# Altium PCB hub.PcbDoc
Units mil, origin at the board's own origin, x right, y up, seen from the top; angles counter-clockwise.
Board outline 6000 x 4000 mil, 2 copper layers (Top Layer, Bottom Layer); 5 components, 0 nets, 44 pads, 0 vias.
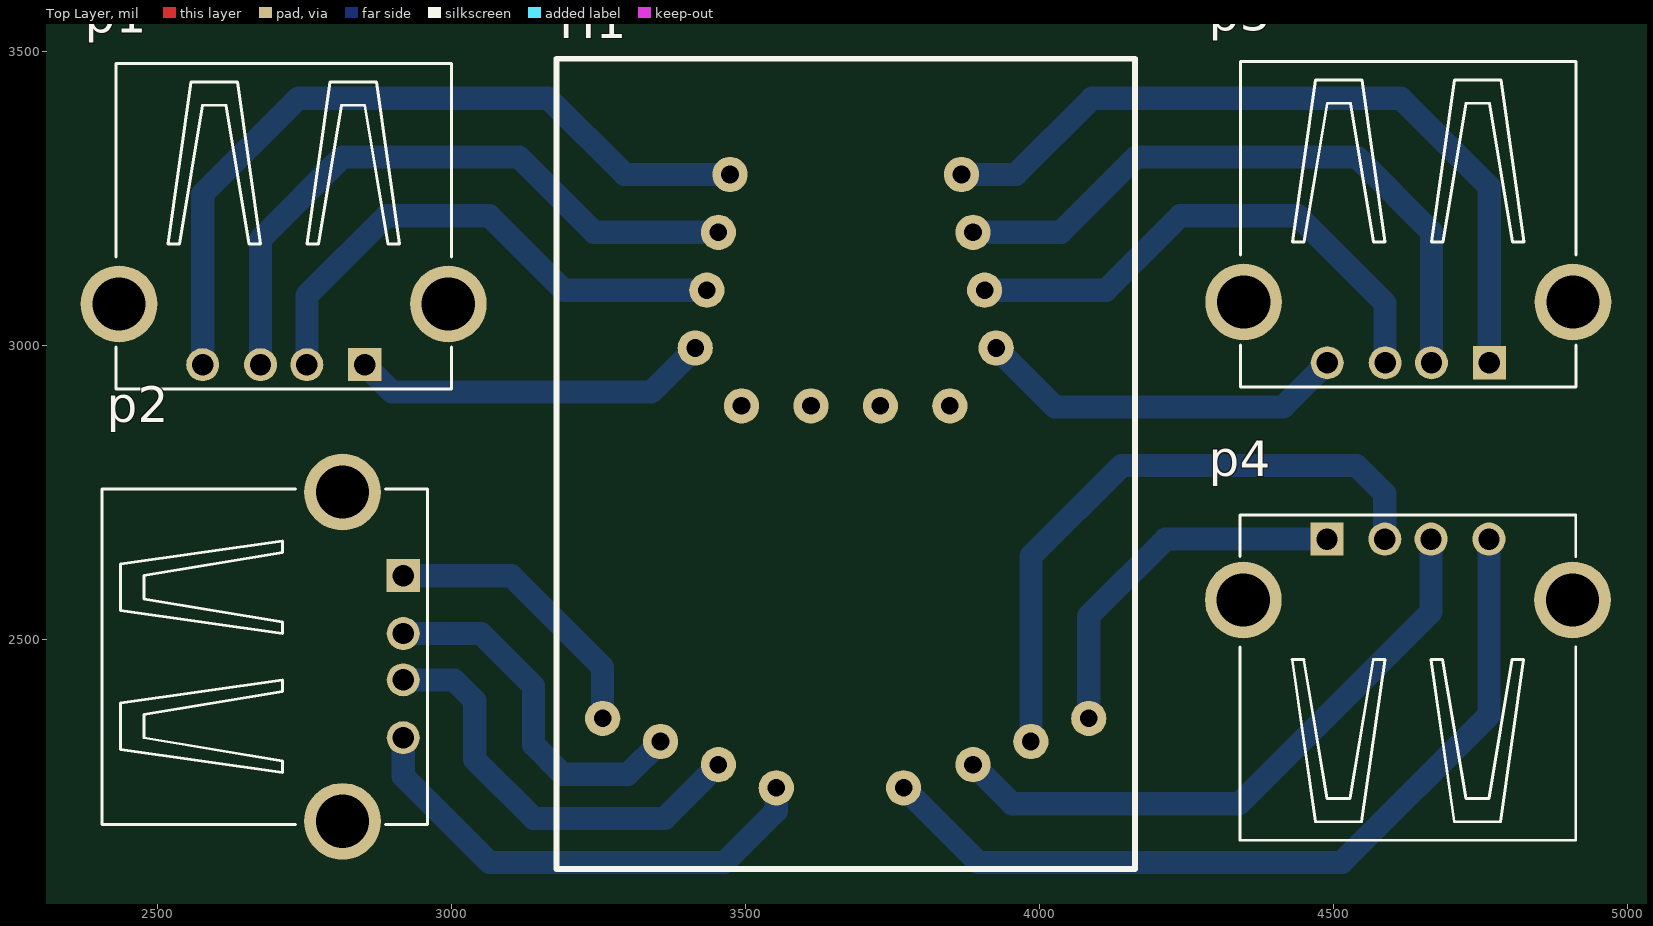
[diagram p0: Top Layer view]
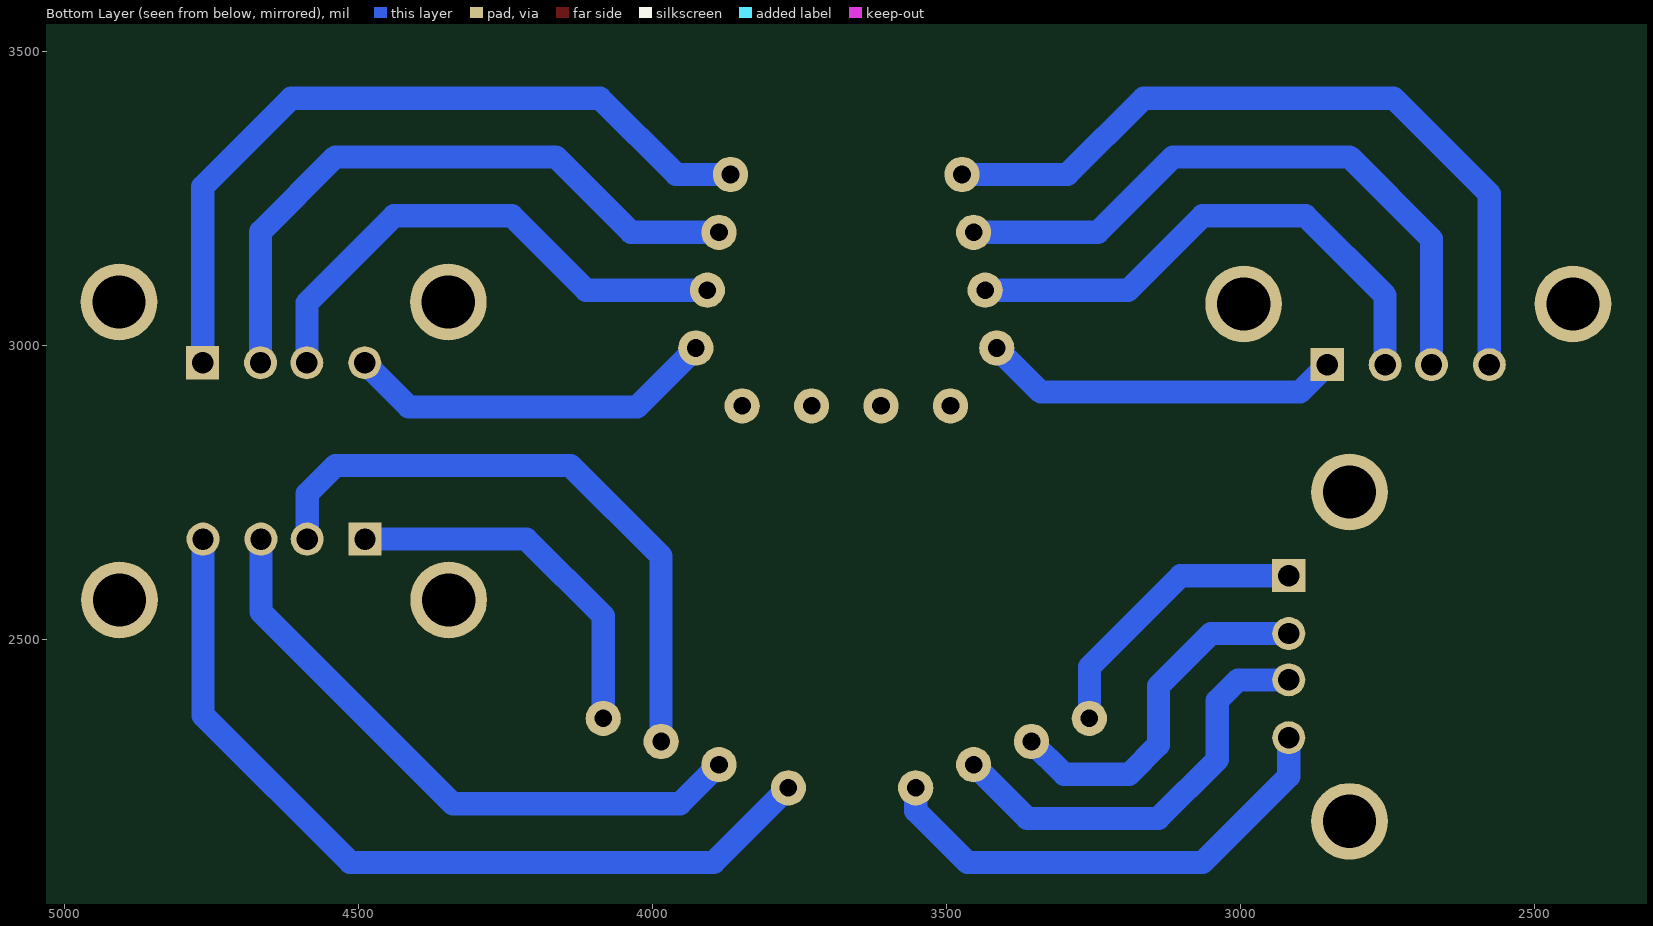
[diagram p1: Bottom Layer view, seen from below]

## Layer stack, top to bottom
Top Solder: solder mask 0.4, Solder Resist, Dk 3.5
Top Layer: signal copper 1.4
Dielectric 1: dielectric 12.6, FR-4, Dk 4.8
Bottom Layer: signal copper 1.4
Bottom Solder: solder mask 0.4, Solder Resist, Dk 3.5

## Board outline
1000,1000 7000,1000 7000,5000 1000,5000

## Design rules (kind name [scope] priority, off if disabled: settings)
Clearance [All] p1: gap=10 ignorepadtopadclearanceinfootprint=FALSE except(0: Arc-Hole Track-Hole SMDPad-Hole THPad-Hole Via-Hole Fill-Hole Poly-Hole Region-Hole Text-Hole)
PolygonConnect [All] p1: connectstyle=Relief reliefconductorwidth=10 reliefentries=4 polygonreliefangle="90 Angle" airgapwidth=10
RoutingVias [All] p1: holewidth=28 width=50 viastyle="Through Hole" minholewidth=28 minwidth=50 maxholewidth=28 maxwidth=50
SolderMaskExpansion [All] p1: expansion=4
Width [All] p1: maxlimit=10 minlimit=10 preferedwidth=10
30 further rules are at their usual default settings.

## Components (designator, comment, footprint, x,y, rotation, side; value= is the part's Value field where it differs from the comment)
H1 "hub_USB" HUB_4USB 3670.91,2768.62 r0 top
p1 "USB" USB_F 2715,3020 r180 top
p2 "USB" USB_F 2865,2470 r270 top
p3 "USB" USB_F 4627.8,3023.35 r180 top
p4 "USB" USB_F 4627.21,2616.65 r0 top

## Footprints (in the part's own frame and the unit in brackets; to place one, negate y for a bottom-side part, rotate by r counter-clockwise, add the part's x,y. Pads: shape width x height; smd on the part's side, far side on the other; paste and mask are expansions set on the pad)
HUB_4USB [mil]
  round 60 hole 30: 1(177.17,127.95) 2(59.06,127.95) 3(-59.06,127.95) 4(-177.17,127.95) 5(-255.91,226.38) 6(-236.22,324.8) 7(-216.54,423.23) 8(-196.85,521.65) 9(-413.39,-403.54) 10(-314.96,-442.91) 11(-216.54,-482.28) 12(-118.11,-521.65) 13(196.85,521.65) 14(216.54,423.23) 15(236.22,324.8) 16(255.91,226.38) 17(413.39,-403.54) 18(314.96,-442.91) 19(216.54,-482.28) 20(98.43,-521.65)
  silkscreen extent -492,-659 492,719
USB_F [mm]
  rect 1.428x1.428 hole 0.92: 1(-3.5,1.355)
  round 1.428 hole 0.92: 2(-1,1.355) 3(1,1.355) 4(3.5,1.355)
  round 3.316 hole 2.3: P1(-7.112,-1.27) P2(7.112,-1.27)
  silkscreen extent -7.25,-11.65 7.25,2.4, body extent -7.89,-11.65 7.89,2.79, height 8.55

## Nets (pads, with @x,y where several pads share a name; then routed paths per layer and width w, separated by ;. In a path a pad name is that pad's centre, name@x,y a point inside that pad or via, vN(x,y) a via of type N, cw(c..) or ccw(c..) an arc to the next point about the centre after c; other vN are vias at no path point)
pads on no net: H1.1 H1.2 H1.3 H1.4 H1.5 H1.6 H1.7 H1.8 H1.9 H1.10 H1.11 H1.12 H1.13 H1.14 H1.15 H1.16 H1.17 H1.18 H1.19 H1.20 p1.1 p1.2 p1.3 p1.4 p1.P1 p1.P2 p2.1 p2.2 p2.3 p2.4 p2.P1 p2.P2 p3.1 p3.2 p3.3 p3.4 p3.P1 p3.P2 p4.1 p4.2 p4.3 p4.4 p4.P1 p4.P2
copper on no net: | length 14789.6
  Bottom Layer w39.37: 2577.21,2966.65 2577.21,3257.21 2740,3420 3165,3420 3294.72,3290.28 3474.06,3290.28 ; 2675.63,2966.65 2675.63,3180.63 2815,3320 3115,3320 3243.15,3191.85 3454.37,3191.85 ; 2754.37,2966.65 2754.37,3084.37 2890,3220 3065,3220 3191.57,3093.43 3434.68,3093.43 ; 2852.8,2966.65 2899.45,2920 3340,2920 3415,2995 ; 2918.35,2332.21 2918.35,2266.65 3065,2120 3465,2120 3552.8,2207.8 3552.8,2246.97 ; 2918.35,2430.63 3004.37,2430.63 3040,2395 3040,2295 3140,2195 3363.03,2195 3454.37,2286.34 ; 2918.35,2509.37 3050.63,2509.37 3140,2420 3140,2320 3190,2270 3300.24,2270 3355.94,2325.71 ; 2918.35,2607.8 3102.2,2607.8 3257.52,2452.48 3257.52,2365.08 ; 3769.33,2246.97 3896.3,2120 4515,2120 4765,2370 4765,2670 ; 3867.76,3290.28 3960.28,3290.28 4090,3420 4615,3420 4765.59,3269.41 4765.59,2970 ; 3887.44,2286.34 3953.78,2220 4340,2220 4666.58,2546.58 4666.58,2670 ; 3887.44,3191.85 4036.85,3191.85 4165,3320 4540,3320 4667.17,3192.83 4667.17,2970 ; 3907.13,3093.43 4113.43,3093.43 4240,3220 4440,3220 4588.43,3071.57 4588.43,2970 ; 3926.81,2995 4026.81,2895 4415,2895 4490,2970 ; 3985.87,2325.71 3985.87,2640.87 4140,2795 4540,2795 4587.84,2747.16 4587.84,2670 ; 4084.29,2365.08 4084.29,2539.29 4215,2670 4489.41,2670